# Altium PCB UCC14240 Test Board.PcbDoc
Units mil, origin at the board's own origin, x right, y up, seen from the top; angles counter-clockwise.
Board outline 2200 x 1100 mil, 2 copper layers (Top Layer, Bottom Layer); 23 components, 11 nets, 83 pads, 70 vias.
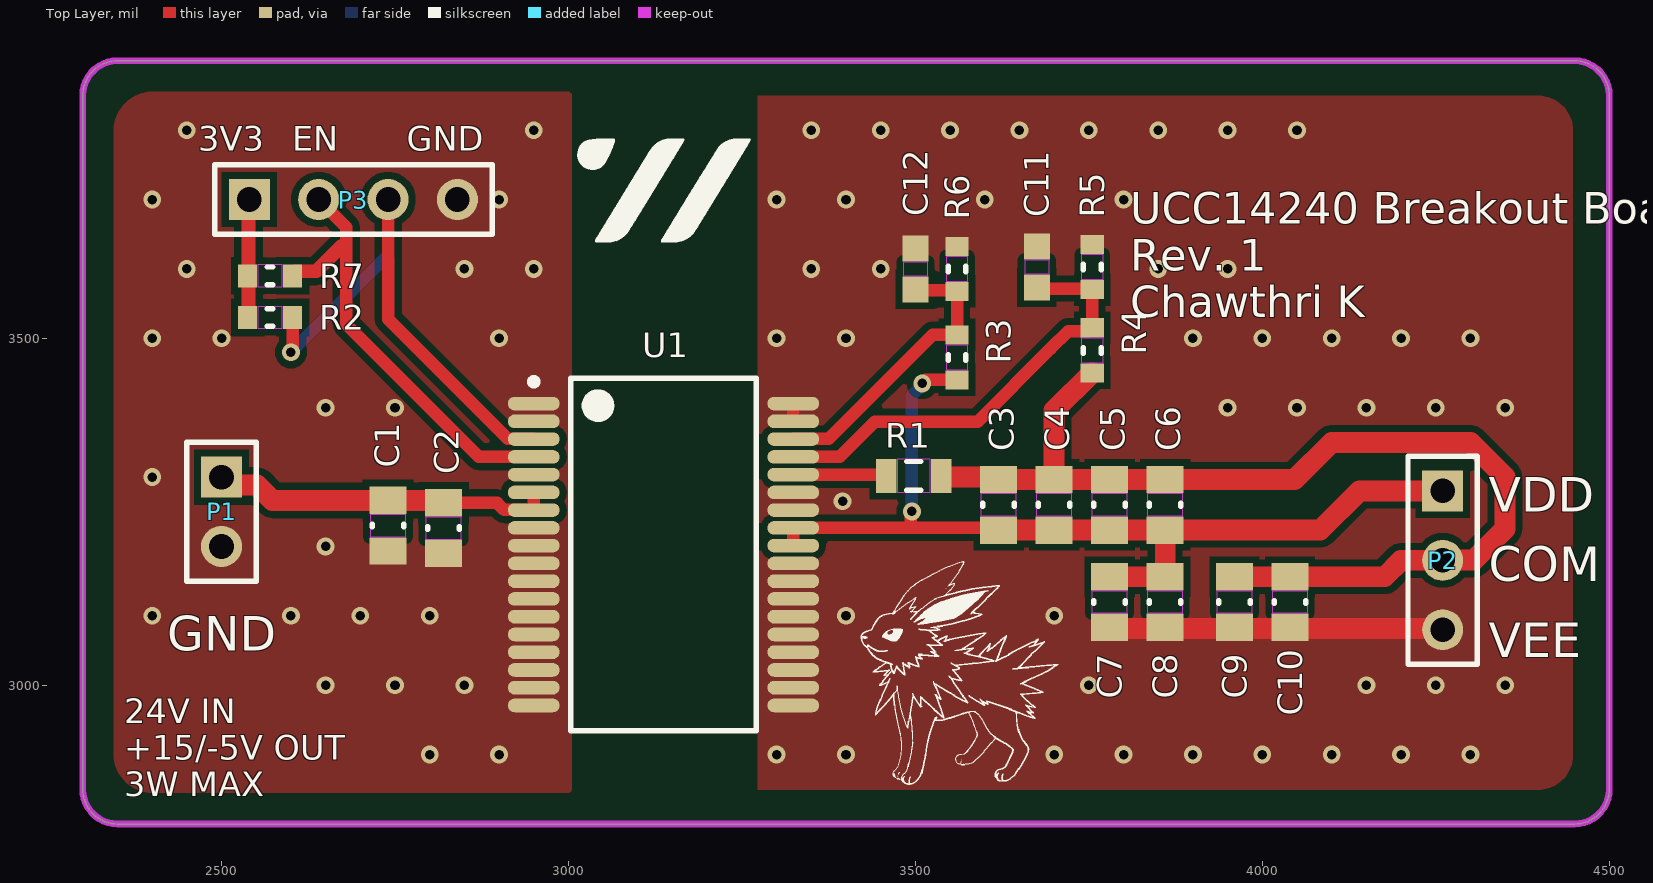
[diagram p0: Top Layer view]
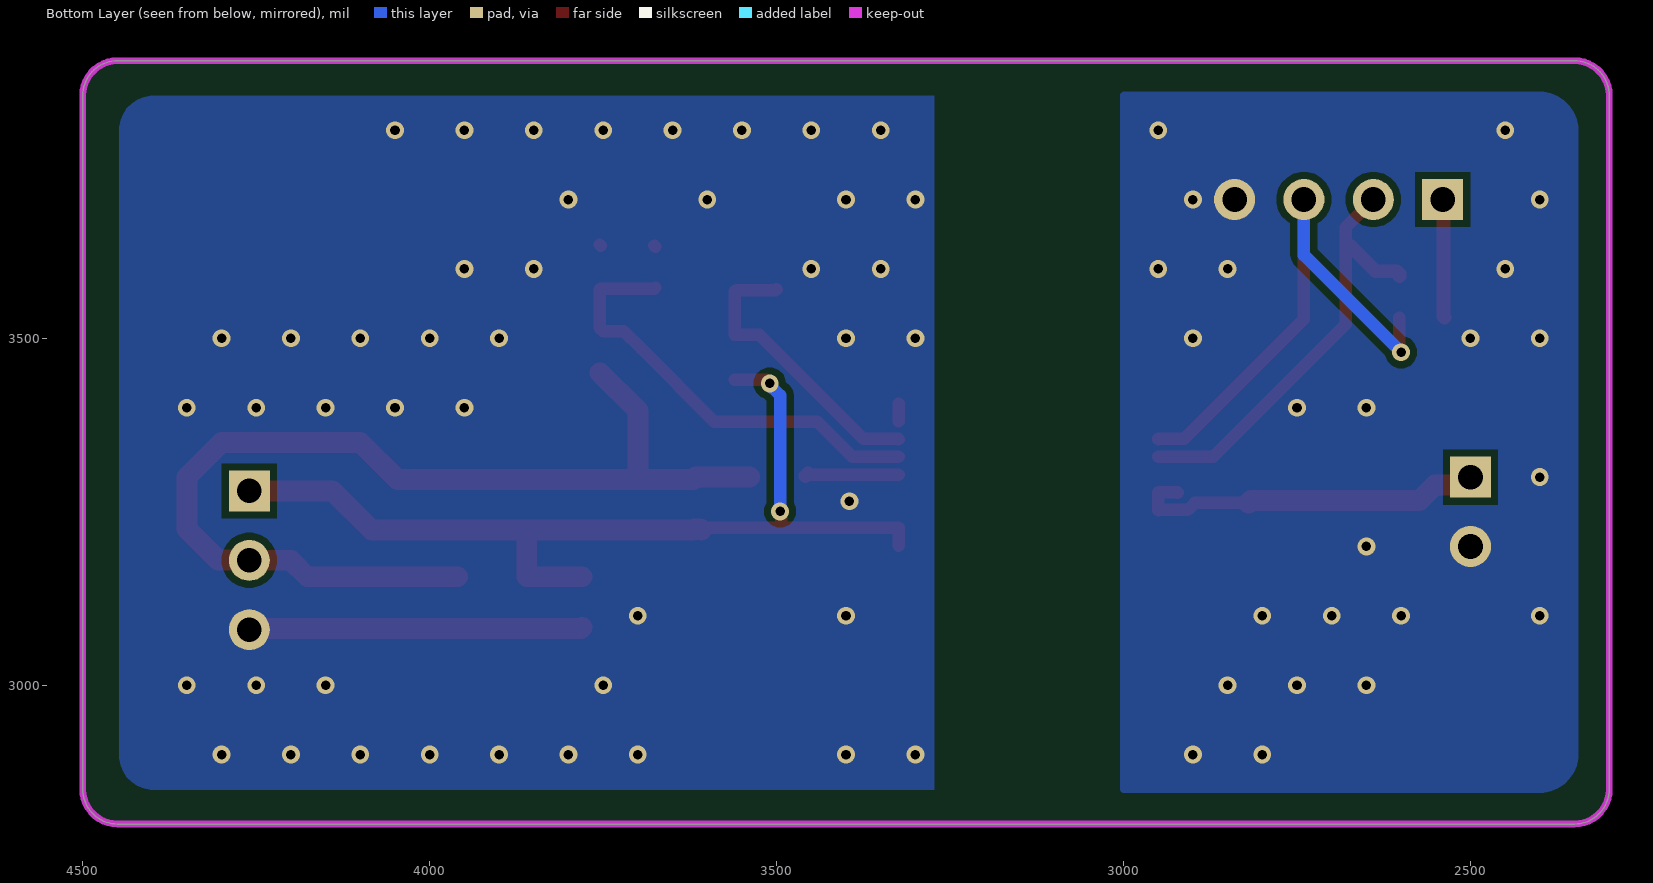
[diagram p1: Bottom Layer view, seen from below]
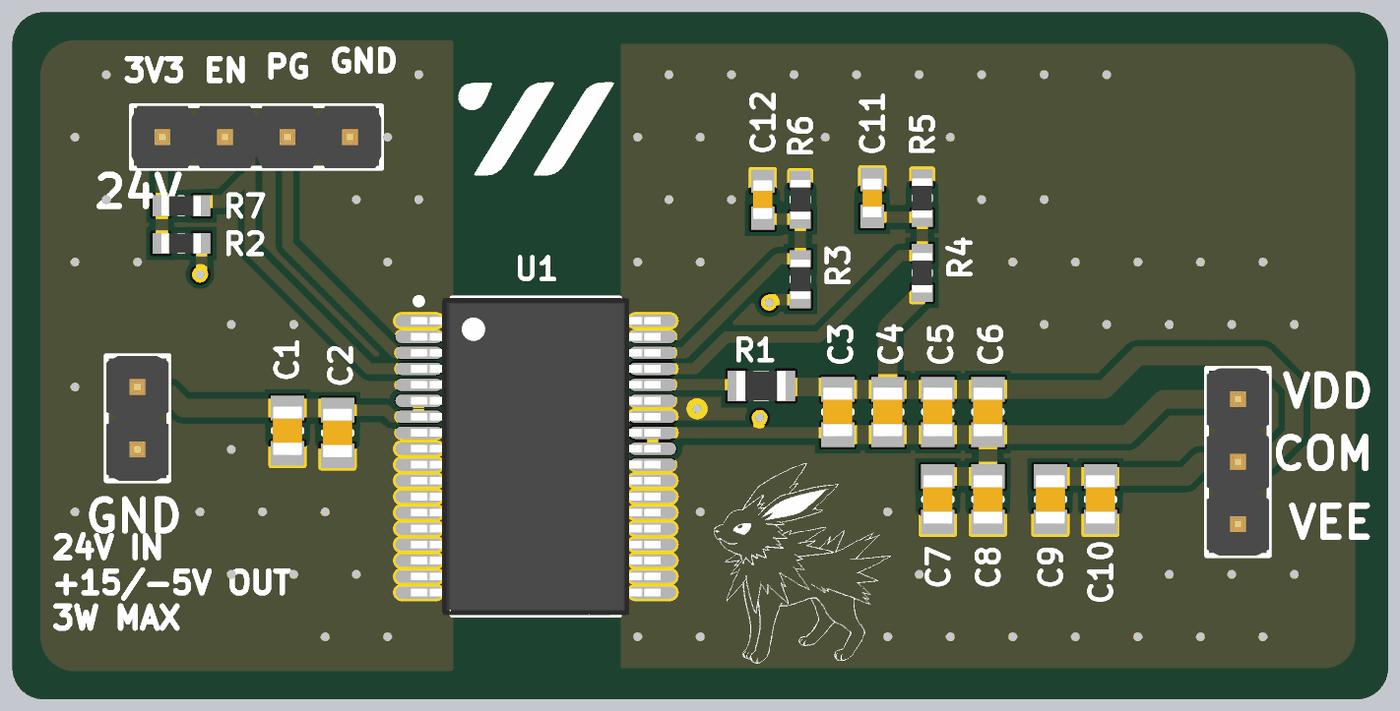
[diagram p2: 3D render of the assembled board from above, using the file's embedded part models]

## Layer stack, top to bottom
Top Solder: solder mask 0.4, Solder Resist, Dk 3.5
Top Layer: signal copper 1.4
Dielectric 1: dielectric 12.6, FR-4, Dk 4.8
Bottom Layer: signal copper 1.4
Bottom Solder: solder mask 0.4, Solder Resist, Dk 3.5

## Board outline
2350,2800 cw(c2350,2850) 2300,2850 2300,3850 cw(c2350,3850) 2350,3900 4450,3900 cw(c4450,3850) 4500,3850 4500,2850 cw(c4450,2850) 4450,2800

## Design rules (kind name [scope] priority, off if disabled: settings)
Clearance [All] p1: gap=10 ignorepadtopadclearanceinfootprint=TRUE except(0: Arc-Hole Track-Hole SMDPad-Hole THPad-Hole Via-Hole Fill-Hole Poly-Hole Region-Hole Text-Hole; 6: Arc-Arc Arc-Track Arc-SMDPad Track-Track Track-SMDPad)
PlaneConnect [All] p1: planeconnectstyle=Direct reliefexpansion=20 reliefentries=4 reliefconductorwidth=10 reliefairgap=10
PolygonConnect PolygonConnect_12 [All vs IsNamedPolygon('Top Layer-VEE')] p1: connectstyle=Direct reliefconductorwidth=10 reliefentries=4 polygonreliefangle="90 Angle" airgapwidth=10
PolygonConnect PolygonConnect_11 [All vs IsNamedPolygon('Bottom Layer-GND')] p2: connectstyle=Direct reliefconductorwidth=10 reliefentries=4 polygonreliefangle="90 Angle" airgapwidth=10
PolygonConnect PolygonConnect_10 [All vs IsNamedPolygon('Bottom Layer-GND')] p3: thpad.connectstyle=Direct thpad.reliefconductorwidth=10 thpad.reliefentries=4 thpad.polygonreliefangle="90 Angle" thpad.airgapwidth=10 smdpad.connectstyle=Direct smdpad.reliefconductorwidth=10 smdpad.reliefentries=4 smdpad.polygonreliefangle="90 Angle" smdpad.airgapwidth=10 via.connectstyle=Relief via.reliefconductorwidth=10 via.reliefentries=4 via.polygonreliefangle="90 Angle" via.airgapwidth=10
PolygonConnect PolygonConnect_9 [All vs IsNamedPolygon('Top Layer-VEE')] p4: thpad.connectstyle=Direct thpad.reliefconductorwidth=10 thpad.reliefentries=4 thpad.polygonreliefangle="90 Angle" thpad.airgapwidth=10 smdpad.connectstyle=Direct smdpad.reliefconductorwidth=10 smdpad.reliefentries=4 smdpad.polygonreliefangle="90 Angle" smdpad.airgapwidth=10 via.connectstyle=Relief via.reliefconductorwidth=10 via.reliefentries=4 via.polygonreliefangle="90 Angle" via.airgapwidth=10
PolygonConnect PolygonConnect_8 [All vs IsNamedPolygon('Bottom Layer-GND') Or IsNamedPolygon('Bottom Layer-VEE')] p5: thpad.connectstyle=Direct thpad.reliefconductorwidth=10 thpad.reliefentries=4 thpad.polygonreliefangle="90 Angle" thpad.airgapwidth=10 smdpad.connectstyle=Direct smdpad.reliefconductorwidth=10 smdpad.reliefentries=4 smdpad.polygonreliefangle="90 Angle" smdpad.airgapwidth=10 via.connectstyle=Relief via.reliefconductorwidth=10 via.reliefentries=4 via.polygonreliefangle="90 Angle" via.airgapwidth=10
PolygonConnect PolygonConnect_7 [All vs IsNamedPolygon('Top Layer-GND') Or IsNamedPolygon('Top Layer-VEE')] p6: thpad.connectstyle=Direct thpad.reliefconductorwidth=10 thpad.reliefentries=4 thpad.polygonreliefangle="90 Angle" thpad.airgapwidth=10 smdpad.connectstyle=Direct smdpad.reliefconductorwidth=10 smdpad.reliefentries=4 smdpad.polygonreliefangle="90 Angle" smdpad.airgapwidth=10 via.connectstyle=Relief via.reliefconductorwidth=10 via.reliefentries=4 via.polygonreliefangle="90 Angle" via.airgapwidth=10
PolygonConnect PolygonConnect_6 [All vs IsNamedPolygon('Bottom Layer-GND') Or IsNamedPolygon('Bottom Layer-VEE')] p7: thpad.connectstyle=Direct thpad.reliefconductorwidth=10 thpad.reliefentries=4 thpad.polygonreliefangle="90 Angle" thpad.airgapwidth=10 smdpad.connectstyle=Direct smdpad.reliefconductorwidth=10 smdpad.reliefentries=4 smdpad.polygonreliefangle="90 Angle" smdpad.airgapwidth=10 via.connectstyle=Relief via.reliefconductorwidth=10 via.reliefentries=4 via.polygonreliefangle="90 Angle" via.airgapwidth=10
PolygonConnect PolygonConnect_5 [All vs IsNamedPolygon('Top Layer-GND') Or IsNamedPolygon('Top Layer-VEE')] p8: thpad.connectstyle=Direct thpad.reliefconductorwidth=10 thpad.reliefentries=4 thpad.polygonreliefangle="90 Angle" thpad.airgapwidth=10 smdpad.connectstyle=Direct smdpad.reliefconductorwidth=10 smdpad.reliefentries=4 smdpad.polygonreliefangle="90 Angle" smdpad.airgapwidth=10 via.connectstyle=Relief via.reliefconductorwidth=10 via.reliefentries=4 via.polygonreliefangle="90 Angle" via.airgapwidth=10
PolygonConnect PolygonConnect_4 [All vs IsNamedPolygon('Top Layer-GND')] p9: thpad.connectstyle=Direct thpad.reliefconductorwidth=10 thpad.reliefentries=4 thpad.polygonreliefangle="90 Angle" thpad.airgapwidth=10 smdpad.connectstyle=Direct smdpad.reliefconductorwidth=10 smdpad.reliefentries=4 smdpad.polygonreliefangle="90 Angle" smdpad.airgapwidth=10 via.connectstyle=Relief via.reliefconductorwidth=10 via.reliefentries=4 via.polygonreliefangle="90 Angle" via.airgapwidth=10
PolygonConnect PolygonConnect_3 [All vs IsNamedPolygon('Top Layer-GND') Or IsNamedPolygon('Top Layer-VEE') Or IsNamedPolygon('Bottom Layer-GND') Or IsNamedPolygon('Bottom Layer-VEE')] p10: thpad.connectstyle=Direct thpad.reliefconductorwidth=10 thpad.reliefentries=4 thpad.polygonreliefangle="90 Angle" thpad.airgapwidth=10 smdpad.connectstyle=Direct smdpad.reliefconductorwidth=10 smdpad.reliefentries=4 smdpad.polygonreliefangle="90 Angle" smdpad.airgapwidth=10 via.connectstyle=Relief via.reliefconductorwidth=10 via.reliefentries=4 via.polygonreliefangle="90 Angle" via.airgapwidth=10
PolygonConnect PolygonConnect_2 [All vs IsNamedPolygon('Top Layer-GND') Or IsNamedPolygon('Top Layer-VEE') Or IsNamedPolygon('Bottom Layer-GND') Or IsNamedPolygon('Bottom Layer-VEE')] p11: thpad.connectstyle=Direct thpad.reliefconductorwidth=10 thpad.reliefentries=4 thpad.polygonreliefangle="90 Angle" thpad.airgapwidth=10 smdpad.connectstyle=Direct smdpad.reliefconductorwidth=10 smdpad.reliefentries=4 smdpad.polygonreliefangle="90 Angle" smdpad.airgapwidth=10 via.connectstyle=Relief via.reliefconductorwidth=10 via.reliefentries=4 via.polygonreliefangle="90 Angle" via.airgapwidth=10
PolygonConnect PolygonConnect_1 [All vs IsNamedPolygon('Top Layer-GND') Or IsNamedPolygon('Top Layer-VEE') Or IsNamedPolygon('Bottom Layer-GND') Or IsNamedPolygon('Bottom Layer-VEE')] p12: thpad.connectstyle=Direct thpad.reliefconductorwidth=10 thpad.reliefentries=4 thpad.polygonreliefangle="90 Angle" thpad.airgapwidth=10 smdpad.connectstyle=Direct smdpad.reliefconductorwidth=10 smdpad.reliefentries=4 smdpad.polygonreliefangle="90 Angle" smdpad.airgapwidth=10 via.connectstyle=Relief via.reliefconductorwidth=10 via.reliefentries=4 via.polygonreliefangle="90 Angle" via.airgapwidth=10
PolygonConnect [All] p13: connectstyle=Relief reliefconductorwidth=10 reliefentries=4 polygonreliefangle="90 Angle" airgapwidth=10
RoutingVias [All] p1: holewidth=125.98 width=236.22 viastyle="Through Hole" minholewidth=13.78 minwidth=25.59 maxholewidth=28 maxwidth=50
SolderMaskExpansion [All] p1: expansion=4 istentingtop=FALSE
Width [All] p1: maxlimit=50 minlimit=10 preferedwidth=15 minimp=50.000000 maximp=50.000000 favimp=50.000000
29 further rules are at their usual default settings.

## Components (designator, comment, footprint, x,y, rotation, side; value= is the part's Value field where it differs from the comment)
C1 "Capacitor - Nonpolarized" "0805 - Capacitor" 2740,3230 r90 top value="2.2 uF"
C2 "Capacitor - Nonpolarized" "0805 - Capacitor" 2820,3226.42 r90 top value="0.1 uF"
C3 "Capacitor - Nonpolarized" "0805 - Capacitor" 3620,3260 r270 top value="10 uF"
C4 "Capacitor - Nonpolarized" "0805 - Capacitor" 3700,3260 r270 top value="10 uF"
C5 "Capacitor - Nonpolarized" "0805 - Capacitor" 3780,3260 r270 top value="10 uF"
C6 "Capacitor - Nonpolarized" "0805 - Capacitor" 3860,3260 r270 top value="0.1 uF"
C7 "Capacitor - Nonpolarized" "0805 - Capacitor" 3780,3120 r90 top value="10 uF"
C8 "Capacitor - Nonpolarized" "0805 - Capacitor" 3860,3120 r90 top value="0.1 uF"
C9 "Capacitor - Nonpolarized" "0805 - Capacitor" 3960,3120 r90 top value="2.2 uF"
C10 "Capacitor - Nonpolarized" "0805 - Capacitor" 4040,3120 r90 top value="0.1 uF"
C11 "Capacitor - Nonpolarized" "0603 - Capacitor" 3675,3602.72 r270 top value="100 pF"
C12 "Capacitor - Nonpolarized" "0603 - Capacitor" 3500,3600 r270 top value="100 pF"
P1 "IN" HDR1X2 2500,3300 r270 top
P2 "OUT" HDR1X3 4260,3280 r270 top
P3 "TO MCU" HDR1X4 2540,3700 r0 top
R1 "Resistor" "0805 - Resistor" 3497.6,3301.77 r0 top value=1k
R2 "Resistor" "0603 - Resistor" 2570,3530 r180 top value=100k
R3 "Resistor" "0603 - Resistor" 3560,3472.48 r270 top value=68.9k
R4 "Resistor" "0603 - Resistor" 3755,3482.72 r270 top value=49.9k
R5 "Resistor" "0603 - Resistor" 3755,3602.72 r270 top value=49.9k
R6 "Resistor" "0603 - Resistor" 3560,3600 r270 top value=10k
R7 "Resistor" "0603 - Resistor" 2570,3590 r180 top value=0
U1 "UCC14240-Q1" SOP65P1020X355-36N 3137.01,3188.39 r0 top

## Footprints (in the part's own frame and the unit in brackets; to place one, negate y for a bottom-side part, rotate by r counter-clockwise, add the part's x,y. Pads: shape width x height; smd on the part's side, far side on the other; paste and mask are expansions set on the pad)
"0603 - Capacitor" [mm] "0603 Chip Capacitor - IPC Medium Density"
  rect 0.95x0.95 smd: 1(-0.75,0) 2(0.75,0)
  Top Layer keep-out region: -0.25,0.45 -0.25,-0.45 0.25,-0.45 0.25,0.45
  body extent -0.8,-0.4 0.8,0.4, height 0.8
"0603 - Resistor" [mm] "0603 Chip Resistor - IPC Medium Density"
  rect 0.7x0.85 smd: 1(-0.825,0) 2(0.825,0)
  Top Layer keep-out region: -0.45,0.4 -0.45,-0.4 0.45,-0.4 0.45,0.4
  silkscreen extent -0.1,-0.33 0.1,0.33, body extent -0.8,-0.4 0.8,0.4, height 0.45
"0805 - Capacitor" [mm] "0805 Chip Capacitor - IPC Medium Density"
  rect 1x1.35 smd: 1(-0.925,0) 2(0.925,0)
  Top Layer keep-out region: -0.4,0.65 -0.4,-0.65 0.4,-0.65 0.4,0.65
  silkscreen extent -0.05,-0.58 0.05,0.58, body extent -1,-0.6 1,0.6, height 1.2
"0805 - Resistor" [mm] "0805 Chip Resistor - IPC Medium Density"
  rect 0.75x1.25 smd: 1(-1,0) 2(1,0)
  Top Layer keep-out region: -0.6,0.6 -0.6,-0.6 0.6,-0.6 0.6,0.6
  silkscreen extent -0.25,-0.53 0.25,0.53, body extent -1,-0.6 1,0.6, height 0.5
HDR1X2 [mm] "Connector; Header; 2 Position"
  rect 1.5x1.5 hole 0.9: 1(0,0)
  round 1.5 hole 0.9: 2(2.54,0)
  silkscreen extent -1.27,-1.27 3.81,1.27, body extent -1.27,-1.27 3.81,1.27, height 8.54
HDR1X3 [mm] "Connector; Header; 3 Position"
  rect 1.5x1.5 hole 0.9: 1(0,0)
  round 1.5 hole 0.9: 2(2.54,0) 3(5.08,0)
  silkscreen extent -1.27,-1.27 6.35,1.27, body extent -1.27,-1.27 6.35,1.27, height 8.54
HDR1X4 [mm] "Connector; Header; 4 Position"
  rect 1.5x1.5 hole 0.9: 1(0,0)
  round 1.5 hole 0.9: 2(2.54,0) 3(5.08,0) 4(7.62,0)
  silkscreen extent -1.27,-1.27 8.89,1.27, body extent -1.27,-1.27 8.89,1.27, height 8.54
SOP65P1020X355-36N [mm] "SOP, 36-Leads, Body 12.83x7.50mm, Pitch 0.65mm, IPC Medium Density"
  oval 1.9x0.5 smd: 1(-4.75,5.525) 9(-4.75,0.325) 10(-4.75,-0.325) 11(-4.75,-0.975) 12(-4.75,-1.625) 13(-4.75,-2.275) 14(-4.75,-2.925) 15(-4.75,-3.575) 16(-4.75,-4.225) 17(-4.75,-4.875) 18(-4.75,-5.525) 19(4.75,-5.525) 20(4.75,-4.875) 21(4.75,-4.225) 22(4.75,-3.575) 23(4.75,-2.925) 24(4.75,-2.275) 25(4.75,-1.625) 26(4.75,-0.975) 29(4.75,0.975) 30(4.75,1.625) 33(4.75,3.575) 36(4.75,5.525)
  oval 1.9x0.5 smd mask+0.051: 2(-4.75,4.875) 3(-4.75,4.225) 4(-4.75,3.575) 5(-4.75,2.925) 6(-4.75,2.275) 7(-4.75,1.625) 8(-4.75,0.975) 27(4.75,-0.325) 28(4.75,0.325) 31(4.75,2.275) 32(4.75,2.925) 34(4.75,4.225) 35(4.75,4.875)
  silkscreen extent -4.87,-6.45 3.4,6.45, body extent -5.07,-6.45 5.07,6.45, height 3.55

## Part data
C1 C2 C3 C4 C5 C6 C7 C8 C9 C10 C11 C12: "Nonpolarized Capacitor"
P1: library part "1x2 Header", "1x2 Pin Header"
P2: library part "1x3 Header", "1x3 Pin Header"
P3: library part "1x4 Header", "1x4 Pin Header"
U1: "Isolated DC/DC Converter with Integrated Transformer", Manufacturer="Texas Instruments", ComponentLink1Description=Datasheet, ComponentLink1URL=https://www.ti.com/lit/ds/symlink/ucc14240-q1.pdf?ts=1634091484132&ref_url=https%253A%252F%252Fwww.ti.com%252Fproduct%252FUCC14240-Q1, MPN=UCC14240-Q1

## Via types
v1: diameter 25.59, hole 13.78, Top Layer to Bottom Layer, tented both sides, 66 vias
v2: diameter 25.59, hole 13.78, Top Layer to Bottom Layer, 4 vias

## Nets (pads, with @x,y where several pads share a name; then routed paths per layer and width w, separated by ;. In a path a pad name is that pad's centre, name@x,y a point inside that pad or via, vN(x,y) a via of type N, cw(c..) or ccw(c..) an arc to the next point about the centre after c; other vN are vias at no path point)
3V3: P3.1 R2.2 R7.2 | length 171
  Top Layer w20: R2.2 2538.76,3531.24 2538.76,3698.76 P3.1
24V: C1.2 C2.2 P1.1 U1.6 U1.7 | length 522.9
  Top Layer w18: C2.2 2897.17,3262.83 2907.32,3252.68 2949.68,3252.68 U1.7 U1.6 ; U1.6@2922.12,3277.17 2922.9,3277.95 U1.6@2949.36,3277.95
  Top Layer w30: P1.1 2511.35,3288.65 2551.35,3288.65 2573.58,3266.42 C1.2 2816.42,3266.42 C2.2
COM: C3.1 C4.1 C5.1 C6.1 C9.2 C10.2 P2.2 R1.2 R4.2 | length 1525.8
  Top Layer w30: R1.2@3538.74,3300 3616.42,3300 C3.1 C4.1 ; R4.2 3754.49,3450.24 3700,3395.75 C4.1 ; C9.2 C10.2 4176.42,3156.42 4200,3180 P2.2 4260.33,3180.33 4305.06,3180.33 4350,3225.27 4350,3300 4300,3350 4100,3350 4046.42,3296.42 C6.1 C5.1 C4.1
EN: P3.2 R7.1 U1.4 | length 634.7
  Top Layer w18: P3.2 2680,3660 2680,3632.3 2680,3520 2870.87,3329.13 U1.4
  Top Layer w20: R7.1 2602.48,3592.95 2606.26,3596.73 2636.73,3596.73 2672.3,3632.3
FBVDD: C12.2 R3.1 R6.2 U1.34 | length 422
  Top Layer w18: U1.34 3324.34,3355.05 3375.05,3355.05 3524.96,3504.96 R3.1 R6.2 3558.52,3569 3501.48,3569 C12.2
FBVEE: C11.2 R4.1 R5.2 U1.33 | length 644.3
  Top Layer w18: U1.33 3390.74,3329.13 3441.61,3380 3590,3380 3695,3485 3720.42,3510.42 3750.22,3510.42 R4.1 R5.2 3753.52,3571.71 3676.48,3571.71 C11.2
GND: C1.1 C2.1 P1.2 P3.4 U1.1 U1.2 U1.5 U1.8 U1.9 U1.10 U1.11 U1.12 U1.13 U1.14 U1.15 U1.16 U1.17 U1.18
  other v1: 2800,2900 2900,2900 2650,3000 2750,3000 2850,3000 2400,3100 2600,3100 2700,3100 2800,3100 2650,3200 2400,3300 2650,3400 2750,3400 2400,3500 2500,3500 2900,3500 2450,3600 2850,3600 2950,3600 2400,3700 2900,3700 2450,3800 2950,3800
NetR1_1: R1.1 U1.32 | length 135.7
  Top Layer w18: U1.32 R1.1@3454.69,3303.54
  Top Layer w20: R1.1@3454.69,3305.32 R1.1
P\G\: P3.3 R2.1 U1.3 | length 783
  Top Layer w18: v2(2600,3480) 2600,3482.05 2602.48,3484.53 R2.1 ; P3.3 2740,3527.62 2912.58,3355.05 2949.68,3355.05 U1.3
  Bottom Layer w18: v2(2600,3480) 2740,3620 P3.3
VDD: C3.2 C4.2 C5.2 C6.2 C7.2 C8.2 P2.1 R3.2 U1.28 U1.29 | length 1407.8
  Top Layer w18: U1.28 U1.29 C3.2@3618.58,3226.77 ; 3493.55,3229.5 3493.55,3249.04 v2(3495,3250.49) ; v2(3510,3435) 3515,3440 R3.2 ; C3.2@3618.58,3225 C3.2
  Top Layer w30: C3.2@3608.43,3223.58 3609.84,3225 C3.2@3618.58,3225 ; C3.2 C4.2 C5.2 C6.2 ; C7.2 C8.2 C6.2 ; P2.1 4140,3280 4083.58,3223.58 C6.2
  Bottom Layer w18: v2(3495,3250.49) 3495,3417.95 3510,3432.95 v2(3510,3435)
VEE: C7.1 C8.1 C9.1 C10.1 C11.1 C12.1 P2.3 R5.1 R6.1 U1.19 U1.20 U1.21 U1.22 U1.23 U1.24 U1.25 U1.26 U1.27 U1.30 U1.31 U1.35 U1.36 | length 511.3
  Top Layer w18: U1.35 U1.36 ; C11.1 C11.1@3676.48,3633.72 ; R5.1@3753.52,3633.72 R5.1
  Top Layer w30: C7.1 3781.79,3081.79 4258.21,3081.79 P2.3
  other v1: 3300,2900 3400,2900 3700,2900 3800,2900 3900,2900 4000,2900 4100,2900 4200,2900 4300,2900 3750,3000 4150,3000 4250,3000 4350,3000 3400,3100 3700,3100 3950,3400 4050,3400 4150,3400 4250,3400 4350,3400 3300,3500 3400,3500 3900,3500 4000,3500 4100,3500 4200,3500 4300,3500 3350,3600 3450,3600 3850,3600 3950,3600 3300,3700 3400,3700 3600,3700 3800,3700 3350,3800 3450,3800 3550,3800 3650,3800 3750,3800 3850,3800 3950,3800 4050,3800
  other v2: 3395,3265

## Polygon pours and split planes (outlines as drawn)
VEE on Bottom Layer "Top Layer-VEE" (solid, remove dead copper, pour order 12): 3272.5,2849.5 3272.5,3849.5 4397.5,3849.5 cw(c4397.5,3799.5) 4447.5,3799.5 4447.5,2899.5 cw(c4397.5,2899.5) 4397.5,2849.5
GND on Bottom Layer "Bottom Layer-GND" (solid, remove dead copper, pour order 10): 2400,2844.99 cw(c2400,2900) 2344.99,2900 2344.99,3800 cw(c2400,3800) 2400,3855.01 3000,3855.01 cw(c3000,3850) 3005.01,3850 3005.01,2850 cw(c3000,2850) 3000,2844.99
VEE on Top Layer "Top Layer-VEE" (solid, remove dead copper, pour order 13): 3272.6,2849.43 3272.6,3849.43 4397.6,3849.43 cw(c4397.6,3799.43) 4447.6,3799.43 4447.6,2899.43 cw(c4397.6,2899.43) 4397.6,2849.43
GND on Top Layer "Bottom Layer-GND" (solid, remove dead copper, pour order 11): 2400,2844.99 cw(c2400,2900) 2344.99,2900 2344.99,3800 cw(c2400,3800) 2400,3855.01 3000,3855.01 cw(c3000,3850) 3005.01,3850 3005.01,2850 cw(c3000,2850) 3000,2844.99

## Keep-outs
Keep-Out Layer:
  lines w10: 2300,2850 ccw(c2350,2850) 2350,2800 4450,2800 ccw(c4450,2850) 4500,2850 4500,3850 ccw(c4450,3850) 4450,3900 2400,3900 2350,3900 ccw(c2350,3850) 2300,3850 2300,2850

## Silkscreen, mask and mechanical layers (free items; w line width, h text height)
Top Overlay:
  drawing of 24 lines, arcs and shapes, not listed
  text "PG" at 2025.24,3770 h35
  text "3V3" at 2466.7,3770 h35
  text "EN" at 2601.69,3770 h35
  text "GND" at 2766.71,3770 h35
  text "UCC14240 Breakout Board / Rev. 1 / Chawthri K" at 3810,3530 h45
  text "24V" at 1849.39,3375 h50
  text "VDD" at 4326.71,3250 h50
  text "COM" at 4326.71,3150 h50
  text "GND" at 2421.71,3050 h50
  text "VEE" at 4326.71,3040 h50
  text "24V IN / +15/-5V OUT / 3W MAX" at 2360,2840 h35